# Altium PCB S10B-M-V2.0.PcbDoc (part 2 of 2)
Units mm, origin at the board's own origin, x right, y up, seen from the top; angles counter-clockwise.
Board outline 236.42 x 127.48 mm, 3 copper layers (Top Layer, Internal Plane 2, Bottom Layer); 189 components, 141 nets, 609 pads, 390 vias.
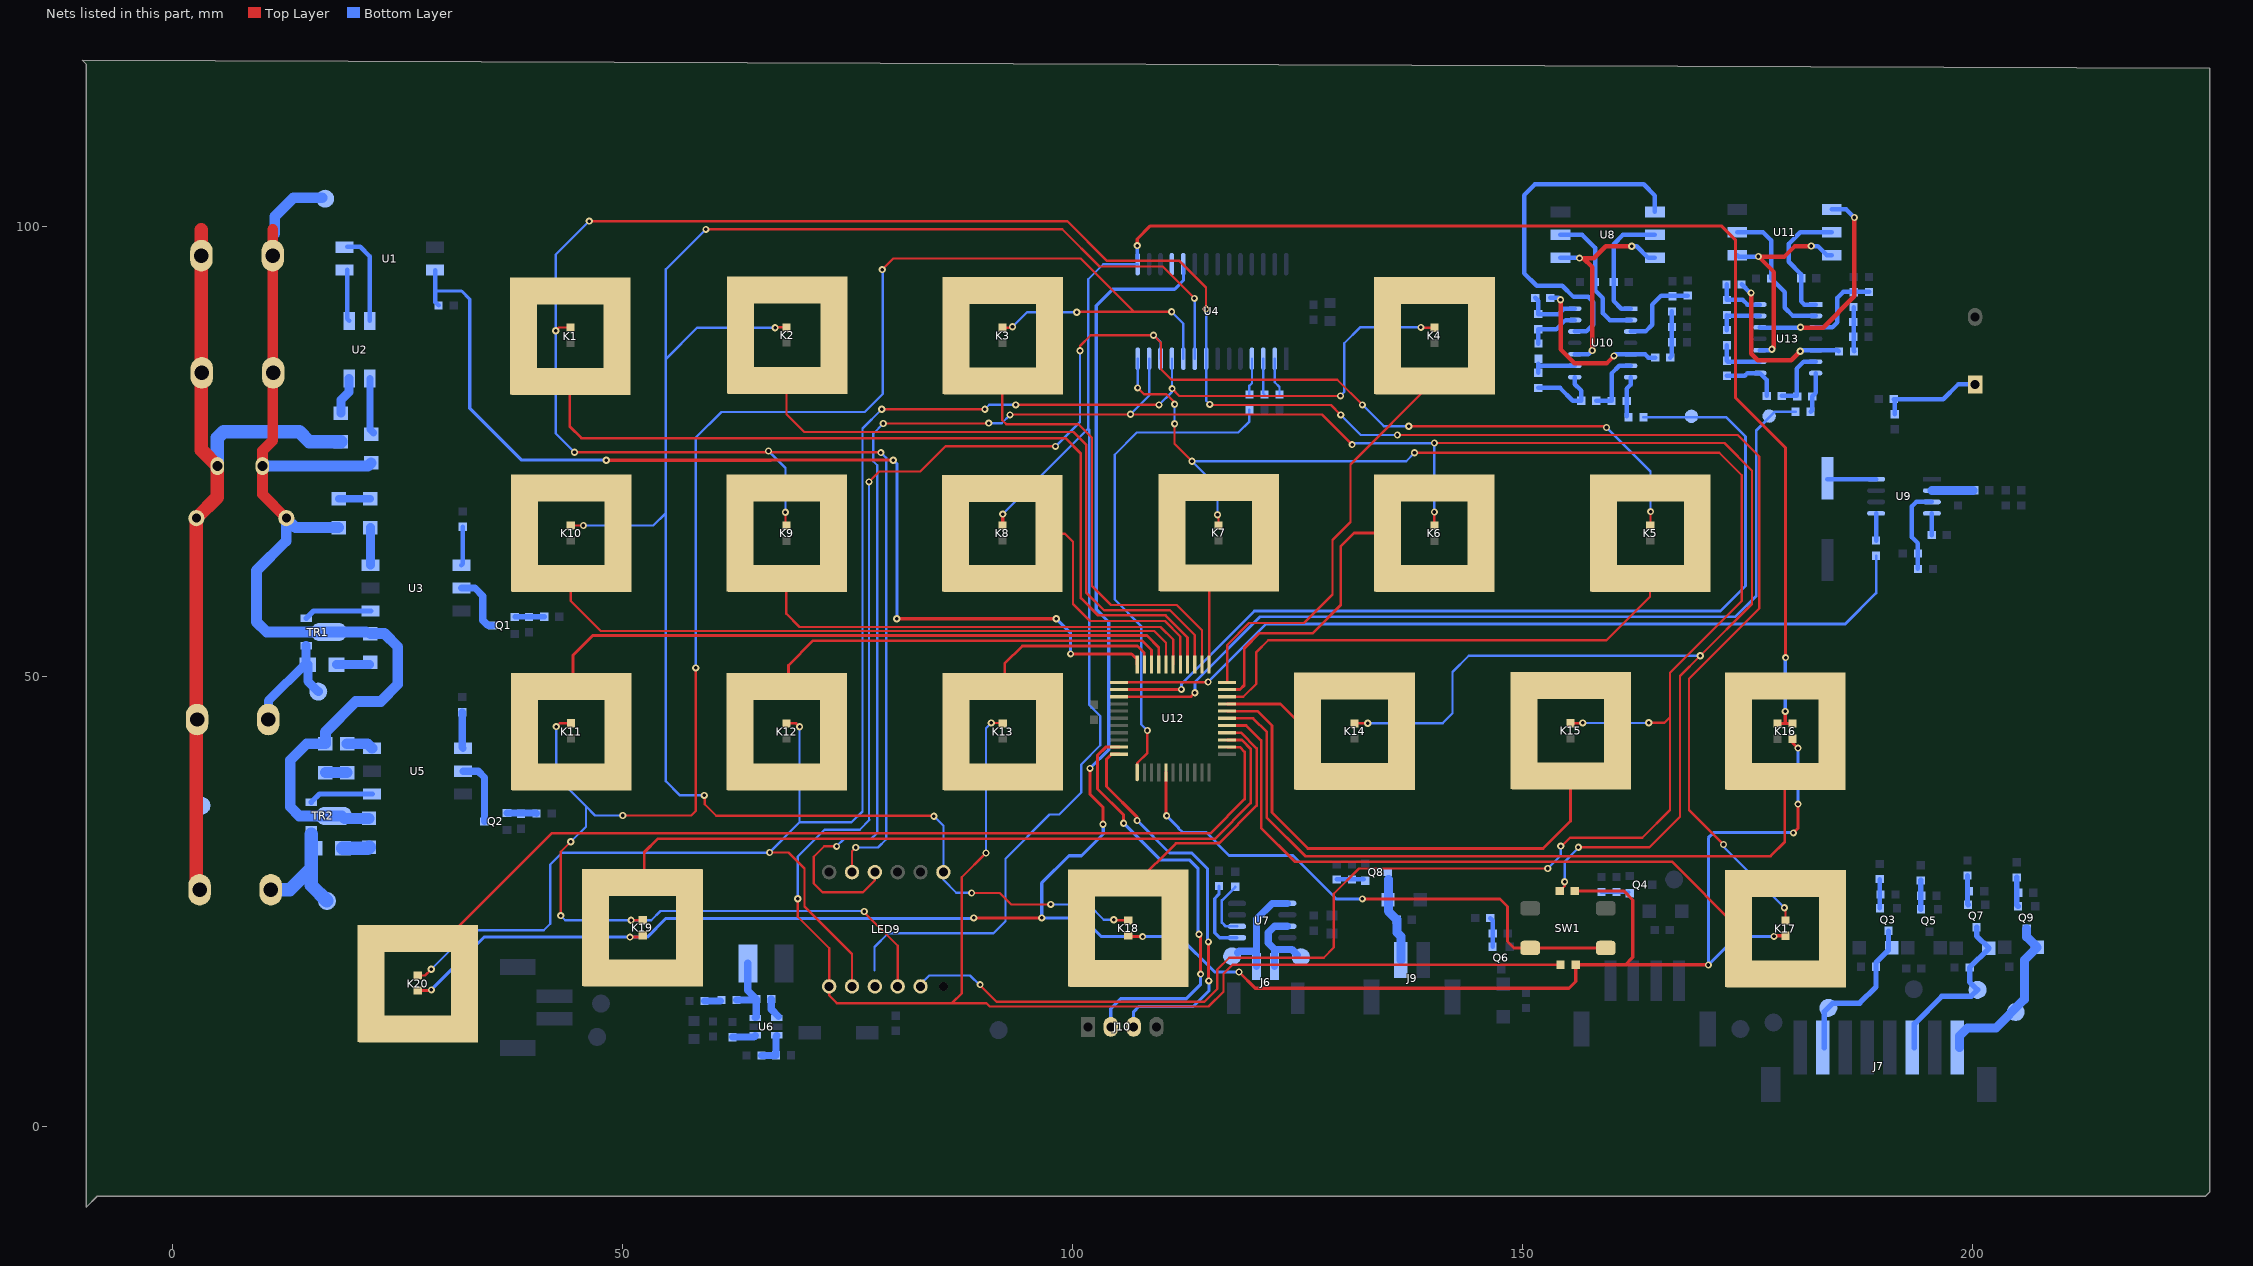
[diagram p3: the nets of this part, all layers, seen from the top]

## Via types
v1: diameter 0.8, hole 0.4, Top Layer to Bottom Layer, tented both sides, 390 vias

## Nets (pads, with @x,y where several pads share a name; then routed paths per layer and width w, separated by ;. In a path a pad name is that pad's centre, name@x,y a point inside that pad or via, vN(x,y) a via of type N, cw(c..) or ccw(c..) an arc to the next point about the centre after c; other vN are vias at no path point) (continued)
GRID6: LED18.2 LED19.2 LED20.2 LED21.2 LED22.2 LED23.2 LED24.2 U4.19 | length 300.8
  Top Layer w0.35: LED21.2@27.239,15.089 28.678,15.089 v1(28.753,15.164) ; v1(50.825,21.031) 52.028,21.031 LED20.2@52.233,21.236 ; v1(89.027,23.165) v1(96.596,23.165) ; v1(101.956,39.776) 101.956,36.906 103.403,35.458 v1(103.403,33.579) ; LED19.2@106.208,21.211 106.337,21.082 v1(107.798,21.082) ; v1(118.516,17.145) 120.32,15.342 155.194,15.342 155.941,16.089 LED22.2@155.941,17.959 161.469,17.959 ; LED23.2@155.84,26.164 161.263,26.164 162.281,25.146 162.281,18.771 161.469,17.959 ; v1(170.688,17.932) 170.661,17.959 161.469,17.959 ; v1(177.978,21.107) 178.056,21.185 LED18.2@179.258,21.185 ; LED24.2@180.035,43.078 180.035,42.647 v1(180.645,42.037) ; v1(180.137,32.614) 180.645,33.122 v1(180.645,35.814)
  Bottom Layer w0.35: v1(28.753,15.164) 34.646,21.057 v1@50.825,21.057 ; v1(50.825,21.031) 52.73,21.031 54.788,23.089 54.8,23.089 ; 54.8,23.101 88.963,23.101 v1(89.027,23.165) ; v1(101.956,39.776) 104.038,41.859 104.038,56.058 102.641,57.455 102.641,91.211 104.47,93.04 111.364,93.04 112.329,94.005 U4.19@112.329,95.82 ; v1@103.429,33.579 103.429,32.487 101.016,30.074 99.619,30.074 96.596,27.051 v1(96.596,23.165) 101.143,23.165 103.226,21.082 v1(107.798,21.082) 111.887,21.082 115.824,17.145 v1(118.516,17.145) ; v1(177.978,21.107) 173.863,21.107 v1(170.688,17.932) 170.688,32.055 171.272,32.639 180.111,32.639 v1(180.137,32.614) ; v1(180.645,35.814) v1(180.645,42.037)
GRID7: U4.18
IR: R25.1 U12.34 | length 92.5
  Top Layer w0.3: U12.34@105.198,49.346 115.107,49.346 v1(115.076,49.378)
  Bottom Layer w0.3: v1(115.076,49.378) 121.527,55.829 185.903,55.829 189.332,59.258 R25.1@189.332,63.424
ISP_CK: J10.3 U12.44 | length 44.5
  Top Layer w0.35: U12.44@105.198,41.346 104.338,41.346 103.784,40.792 103.784,37.77 107.188,34.366 v1(107.188,33.985) ; v1(115.113,20.498) 115.138,20.472 v1@115.138,16.154
  Bottom Layer w0.35: J10.3@106.807,11.049 106.807,12.751 107.366,13.31 113.436,13.31 115.164,15.037 v1(115.164,16.154) ; v1(107.188,33.985) 110.795,30.378 113.259,30.378 115.011,28.626 v1@115.011,20.498
ISP_DA: J10.2 U12.43 | length 48.1
  Top Layer w0.35: U12.43@105.198,42.146 103.69,42.146 102.794,41.25 102.794,37.49 105.689,34.595 v1(105.689,33.68) ; v1(114.071,21.336) 114.249,21.158 v1(114.249,16.916)
  Bottom Layer w0.35: J10.2@104.267,11.049 104.267,13.081 105.359,14.173 112.649,14.173 114.249,15.773 v1(114.249,16.916) ; v1(105.689,33.68) 109.753,29.616 112.979,29.616 113.97,28.626 113.97,21.336 v1(114.071,21.336)
K1: K1.2 U12.26 | length 95.8
  Top Layer w0.3: K1.2@44.142,82.782 44.142,77.753 45.415,76.479 99.212,76.479 100.94,74.752 100.94,58.725 102.87,56.794 110.338,56.794 112.799,54.333 U12.26@112.799,51.346
K2: K2.2 U12.25 | length 72.2
  Top Layer w0.254: K2.2@68.232,82.91 68.232,79.139 70.206,77.165 100.127,77.165 101.524,75.768 101.524,59.329 103.499,57.353 110.846,57.353 113.599,54.6 U12.25@113.599,51.346
K3: K3.2 U12.24 | length 50.5
  Top Layer w0.254: K3.2@92.199,82.858 92.199,78.489 92.659,78.029 100.686,78.029 102.184,76.53 102.184,60.042 104.289,57.937 111.608,57.937 114.399,55.146 U12.24@114.399,51.346 ; K3.2@97.457,87.862 K3.2@98.244,87.862
K4: K4.2 U12.22 | length 46.6
  Top Layer w0.254: U12.22@117.199,49.346 117.199,53.495 119.634,55.931 125.73,55.931 128.905,59.106 128.905,65.176 130.899,67.17 130.899,73.569 K4.2@140.19,82.86
K5: K5.2 U12.20 | length 55.7
  Top Layer w0.254: U12.20@117.199,47.746 118.993,47.746 120.447,49.2 120.447,52.705 121.768,54.026 159.36,54.026 164.193,58.859 K5.2@164.193,60.889
K6: K6.2 U12.21 | length 31.3
  Top Layer w0.3: U12.21@117.199,48.546 118.625,48.546 119.101,49.022 119.101,53.137 120.777,54.813 126.721,54.813 129.819,57.912 129.819,64.465 131.297,65.943 K6.2@135.015,65.943
K7: K7.2 U12.23 | length 10
  Top Layer w0.254: U12.23@115.199,51.346 115.199,59.926 K7.2@116.212,60.939
K8: K8.2 U12.27 | length 26.5
  Top Layer w0.254: K8.2@97.416,65.867 99.182,65.867 100.076,64.973 100.076,58.039 101.956,56.159 110.287,56.159 111.999,54.448 U12.27@111.999,51.346
K9: K9.2 U12.28 | length 50.9
  Top Layer w0.254: K9.2@68.206,60.889 68.206,56.965 69.672,55.499 109.804,55.499 111.199,54.105 U12.28@111.199,51.346
K10: K10.2 U12.29 | length 73
  Top Layer w0.254: K10.2@44.229,60.889 44.229,58.387 47.574,55.042 109.093,55.042 110.399,53.736 U12.29@110.399,51.346
K11: K11.2 U12.30 | length 71.9
  Top Layer w0.3: K11.2@44.483,48.893 44.483,52.357 46.685,54.559 108.28,54.559 109.599,53.241 U12.30@109.599,51.346
K12: K12.2 U12.31 | length 45.9
  Top Layer w0.3: K12.2@68.435,48.893 68.435,51.239 71.171,53.975 107.747,53.975 108.799,52.923 U12.31@108.799,51.346
K13: K13.2 U12.32 | length 20.5
  Top Layer w0.3: K13.2@92.463,48.893 92.463,51.417 94.437,53.391 107.213,53.391 107.999,52.606 U12.32@107.999,51.346
K14: K14.2 U12.19 | length 10.2
  Top Layer w0.3: U12.19@117.199,46.946 121.583,46.946 123.125,46.946 K14.2@126.15,43.921
K15: K15.2 U12.18 | length 56.4
  Top Layer w0.3: U12.18@117.199,46.146 120.579,46.146 122.174,44.552 122.174,34.874 126.162,30.886 152.324,30.886 155.354,33.916 K15.2@155.354,38.918
K16: K16.2 U12.17 | length 81.8
  Top Layer w0.3: U12.17@117.199,45.346 120.084,45.346 121.615,43.815 121.615,34.29 125.882,30.023 177.597,30.023 179.179,31.605 K16.2@179.179,38.892
K17: K17.2 U12.16 | length 71.9
  Top Layer w0.3: U12.16@117.199,44.546 119.309,44.546 120.972,42.883 120.972,33.155 124.714,29.413 166.643,29.413 K17.2@174.055,22.001
K18: K18.2 U12.15 | length 28
  Top Layer w0.3: K18.2@106.408,27.049 107.085,27.049 111.489,31.453 116.031,31.453 116.074,31.496 116.332,31.496 120.472,35.636 120.472,42.012 118.738,43.746 U12.15@117.199,43.746
K19: K19.2 U12.14 | length 82.1
  Top Layer w0.3: K19.2@52.407,27.075 52.407,30.462 53.899,31.953 115.824,31.953 119.812,35.941 119.812,41.961 118.826,42.946 U12.14@117.199,42.946
K20: K20.2 U12.13 | length 105.5
  Top Layer w0.3: K20.2@27.439,20.877 30.428,20.877 42.113,32.563 115.341,32.563 119.151,36.373 119.151,41.605 118.61,42.146 U12.13@117.199,42.146
L: J1.1 J2.2 pad.4 R3.2 R4.2 R13.2 R66.1 R67.1 TC1.2 TR1.2 TR2.2 VDR1.1 | length 124.2
  Top Layer w1.2: 11.108,99.67 J2.2@11.108,96.776 11.108,76.233 9.968,75.093 VDR1.1@9.968,73.381 9.968,70.242 TC1.2@12.62,67.589
  Bottom Layer w1.2: VDR1.1@9.968,73.381 21.691,73.381 R3.2@22.047,73.737 ; 11.328,99.238 11.328,101.117 13.411,103.2 pad.4@16.586,103.2 ; R4.2@18.44,66.548 13.661,66.548 TC1.2@12.62,67.589 12.62,65.071 9.322,61.773 9.322,56.058 10.439,54.94 TR1.2@14.834,54.94 17.371,54.94 TR1.2@17.374,54.938 R66.1@21.452,54.938 ; R67.1@21.819,34.214 19.075,34.214 18.796,34.493 TR2.2@15.392,34.493 14.072,34.493 13.056,35.509 13.056,40.691 14.884,42.519 R13.2@16.967,42.519 16.967,43.84 20.345,47.219 23.114,47.219 25.019,49.124 25.019,53.289 23.546,54.762 R66.1@21.971,54.762
LEFT: C19.2 D5.1 J7.6 pad.16@200.609,15.164 Q7.C | length 20
  Bottom Layer w0.6: J7.6@193.577,8.738 193.577,11.382 196.647,14.453 199.898,14.453 pad.16@200.609,15.164 199.731,16.042 C19.2@199.731,17.655 201.854,19.778 D5.1@201.854,19.812 200.508,21.158 Q7.C@200.508,22.143
LEG: C16.2 D1.1 J7.2 pad.16@184.023,13.157 Q3.C | length 17.7
  Bottom Layer w0.6: J7.2@183.577,8.738 183.577,12.736 184.531,13.691 187.503,13.691 189.317,15.505 C16.2@189.317,17.731 189.317,18.197 190.703,19.583 Q3.C@190.703,21.712
N: J1.2 J2.1 J3.2 J4.2 pad.3 R1.2 TC1.1 VDR1.2 | length 92.8
  Top Layer w1.5: J4.2@2.985,26.291 2.62,26.655 TC1.1@2.62,67.589 4.968,69.937 VDR1.2@4.968,73.381 3.188,75.16 3.188,99.644
  Bottom Layer w1.5: VDR1.2@4.968,73.381 4.968,76.519 5.664,77.216 14.046,77.216 15.189,76.073 R1.2@18.694,76.073
NetBUZZ1_2: BUZZ1.2 R18.1 R21.1 | length 11.4
  Bottom Layer w0.5: R21.1@191.4,79.148 191.4,80.723 R18.1@191.298,80.824 196.801,80.824 198.434,82.458 BUZZ1.2@200.33,82.458
NetC5_1: C5.1 U6.1 | length 2.3
  Bottom Layer w0.8: C5.1@66.533,14.149 66.533,13.015 U6.1@67.335,12.213
NetC5_2: C5.2 L1.1 R24.2 U6.6 | length 8.7
  Bottom Layer w0.8: R24.2@62.672,14.048 64.755,14.048 C5.2@64.857,14.149 ; L1.1@63.924,18.112 63.924,15.083 C5.2@64.857,14.149 ; U6.6@64.749,12.076 64.857,12.184 C5.2@64.857,14.149
NetC6_1: C6.1 R23.2 U9.3 | length 9.6
  Bottom Layer w0.5: R23.2@193.98,61.951 C6.1@193.98,63.652 193.98,64.821 193.319,65.481 193.319,68.91 193.802,69.393 U9.3@195.529,69.393
NetC7_2: C7.2 R24.1 | length 1.8
  Bottom Layer w0.8: C7.2@59.116,13.921 R24.1@60.869,13.921
NetC11_2: C11.2 L2.2 U9.2 | length 4.6
  Bottom Layer w1: U9.2@195.529,70.663 C11.2@200.101,70.663
NetC12_2: C12.2 U8.2 U10.1 | length 13.6
  Bottom Layer w0.5: U10.1@162.037,90.883 161.009,90.883 160.158,91.734 C12.2@160.158,93.829 160.158,98.055 161.188,99.085 U8.2@164.744,99.085
NetC14_1: C14.1 U9.4 | length 2.4
  Bottom Layer w0.5: C14.1@195.504,65.71 195.504,68.097 U9.4@195.529,68.123
NetC15_2: C15.2 R30.2 R34.2 R38.1 | length 5.2
  Bottom Layer w0.5: R34.2@166.457,85.447 166.635,85.625 C15.2@166.635,87.149 R38.1@166.635,88.851 R30.2@166.635,90.578
NetC17_2: C17.2 U11.2 U13.1 | length 14
  Bottom Layer w0.5: U13.1@182.611,91.34 181.354,91.34 181.011,91.683 C17.2@181.011,94.261 181.011,94.681 179.603,96.088 179.603,98.069 180.899,99.365 U11.2@184.404,99.365
NetC20_2: C20.2 D7.1 J9.1 Q8.C | length 9.5
  Bottom Layer w1: 135.113,27.403 135.113,23.903 C20.2@136.053,22.963 136.053,21.559 136.505,21.107 J9.1@136.505,18.485
NetC25_2: C25.2 R51.2 R54.2 R58.1 | length 4.9
  Bottom Layer w0.5: R51.2@186.828,91.061 186.828,86.184 R54.2@186.878,86.133
NetC26_1: C26.1 R66.2 | length 3.7
  Bottom Layer w1: C26.1@18.212,51.308 R66.2@21.882,51.308
NetC26_2: C26.2 J3.1 pad.6 TR1.1 | length 13.4
  Bottom Layer w1: J3.1@10.625,45.214 10.625,47.278 14.834,51.486 TR1.1@14.834,53.416 ; C26.2@15.012,51.308 15.012,49.479 pad.6@16.18,48.311
NetC27_1: C27.1 R67.2 | length 2.9
  Bottom Layer w1.5: C27.1@18.923,30.886 21.691,30.886 R67.2@21.819,31.014
NetC27_2: C27.2 J4.1 pad.5 TR2.1 | length 13.6
  Bottom Layer w1.5: J4.1@10.905,26.291 13.006,26.291 15.392,28.677 ; 15.392,32.436 15.392,28.677 ; pad.5@17.145,25.044 15.392,26.797 15.392,28.677
NetJ6_1: J6.1 pad.8 U7.5 | length 11.6
  Bottom Layer w0.8: pad.8@118.364,19.279 118.542,19.456 120.474,19.456 ; J6.1@120.474,17.759 120.474,19.456 ; U7.5@123.886,24.767 122.201,24.767 120.474,23.039 120.474,19.456
NetJ6_2: J6.2 pad.9 U7.7 | length 9.3
  Bottom Layer w0.8: J6.2@122.474,17.759 122.474,19.665 ; U7.7@123.886,22.227 122.455,22.227 121.768,21.539 121.768,20.371 122.474,19.665 ; pad.9@124.993,19.05 124.379,19.665 122.474,19.665
NetQ1_B: Q1.B R7.1 R9.2 | length 3.3
  Bottom Layer w0.6: Q1.B@38.04,56.628 41.27,56.628 R9.2@41.286,56.644
NetQ1_C: Q1.C U3.2 | length 6.8
  Bottom Layer w0.8: U3.2@32.091,59.819 33.603,59.819 34.468,58.953 34.468,56.236 35.025,55.678 Q1.C@35.54,55.678
NetQ2_B: Q2.B R15.1 R16.2 | length 3.3
  Bottom Layer w0.8: Q2.B@37.151,34.835 40.386,34.835 R16.2@40.447,34.774
NetQ2_C: Q2.C U5.2 | length 7.6
  Bottom Layer w0.8: U5.2@32.258,39.472 33.96,39.472 34.651,38.781 Q2.C@34.651,33.885
NetQ3_B: Q3.B R27.1 R33.1 | length 3.3
  Bottom Layer w0.5: R33.1@189.738,27.483 189.738,24.227 Q3.B@189.753,24.212
NetQ4_B: Q4.B R32.1 R35.1 | length 3
  Bottom Layer w0.4: R35.1@158.801,26.035 R32.1@160.477,26.035 Q4.B@161.808,26.035
NetQ5_B: Q5.B R40.1 R44.2 | length 3.2
  Bottom Layer w0.6: R44.2@194.285,27.33 194.285,24.125 Q5.B@194.3,24.11
NetQ6_B: Q6.B R42.1 R46.1 | length 3.3
  Bottom Layer w0.5: R46.1@146.442,23.141 146.711,22.872 Q6.B@146.711,19.971
NetQ7_B: Q7.B R50.1 R53.2 | length 3.2
  Bottom Layer w0.6: R53.2@199.492,27.864 199.492,24.709 Q7.B@199.558,24.643
NetQ8_B: Q8.B R55.1 R60.1 | length 3
  Bottom Layer w0.5: R60.1@129.388,27.432 R55.1@131.064,27.432 Q8.B@132.395,27.432
NetQ9_B: Q9.B R61.1 R64.2 | length 3.3
  Bottom Layer w0.6: R64.2@204.953,27.661 204.953,24.608 Q9.B@205.12,24.44
NetR1_1: R1.1 U2.AC2 | length 4.2
  Bottom Layer w1: R1.1@18.694,79.273 18.694,80.721 19.612,81.639 U2.AC2@19.612,83.111
NetR3_1: R3.1 U2.AC1 | length 6.2
  Bottom Layer w0.8: U2.AC1@21.912,83.111 21.912,77.478 R3.1@22.301,77.089
NetR4_1: R4.1 R5.1 | length 3.5
  Bottom Layer w0.8: R4.1@18.44,69.748 R5.1@21.971,69.748
NetR5_2: R5.2 U3.6 | length 4.2
  Bottom Layer w1: U3.6@21.971,62.378 R5.2@21.971,66.548
NetR6_2: R6.2 U3.1 | length 4.4
  Bottom Layer w0.5: U3.1@32.091,62.359 32.243,62.511 R6.2@32.243,66.651
NetR8_2: R8.2 U4.2 | length 4.2
  Bottom Layer w0.254: U4.2@122.489,85.32 122.489,82.692 123.023,82.158 R8.2@123.023,81.332
NetR10_2: R10.2 U4.3 | length 4
  Bottom Layer w0.254: U4.3@121.219,85.32 121.219,81.459 R10.2@121.346,81.332
NetR11_2: R11.2 U4.4 | length 4.1
  Bottom Layer w0.254: R11.2@119.67,81.332 119.67,82.307 119.949,82.586 U4.4@119.949,85.32
NetR12_1: R12.1 R13.1 | length 2.4
  Bottom Layer w1.2: R13.1@16.967,39.319 R12.1@19.38,39.319
NetR12_2: R12.2 U5.6 | length 3
  Bottom Layer w1.2: R12.2@19.38,42.519 21.65,42.519 U5.6@22.158,42.012
NetR14_2: R14.2 U5.1 | length 4
  Bottom Layer w0.8: R14.2@32.182,46.025 32.182,42.088 U5.1@32.258,42.012
NetR17_1: R17.1 R20.2 U6.3 | length 3.8
  Bottom Layer w0.8: R17.1@65.441,7.876 67.016,7.876 R20.2@67.041,7.901 67.041,9.981 U6.3@67.135,10.076
NetR19_2: R19.2 U6.4 | length 2.6
  Bottom Layer w0.8: R19.2@62.215,9.908 64.581,9.908 U6.4@64.749,10.076
NetR22_2: R22.2 U7.2 | length 6.4
  Bottom Layer w0.3: R22.2@118.11,26.619 116.611,25.121 116.611,22.658 117.043,22.227 U7.2@118.298,22.227
NetR25_2: R25.2 U9.5 | length 3
  Bottom Layer w0.5: U9.5@189.329,68.123 189.329,65.103 R25.2@189.332,65.1
NetR26_1: R26.1 R31.1 U10.14 | length 6.3
  Bottom Layer w0.5: R26.1@151.445,92.077 151.776,91.746 R31.1@151.776,90.273 154.027,90.273 154.637,90.883 U10.14@155.837,90.883
NetR26_2: R26.2 R34.1 U10.5 | length 18.4
  Top Layer w0.5: v1(154.254,91.872) 154.254,86.36 155.778,84.836 159.41,84.836 v1(160.198,85.623)
  Bottom Layer w0.5: R26.2@153.122,92.077 154.049,92.077 v1(154.254,91.872) ; v1(160.198,85.623) 160.377,85.803 U10.5@162.037,85.803 163.651,85.803 164.006,85.447 R34.1@164.78,85.447
NetR28_2: R28.2 R36.1 U10.3 | length 9.3
  Bottom Layer w0.5: U10.3@162.037,88.343 163.705,88.343 164.44,89.078 164.44,91.338 165.43,92.329 R28.2@168.402,92.329
NetR29_1: R29.1 U8.5 U10.2 | length 15.5
  Bottom Layer w0.5: U8.5@154.244,99.085 156.642,99.085 158.1,97.627 R29.1@158.1,93.855 158.1,92.903 158.966,92.037 158.966,90.361 159.714,89.613 U10.2@162.037,89.613
NetR31_2: R31.2 R37.1 U10.13 | length 6.1
  Bottom Layer w0.5: R37.1@151.801,86.997 151.801,88.571 R31.2@151.776,88.597 153.799,88.597 154.815,89.613 U10.13@155.837,89.613
NetR37_2: R37.2 R41.2 U10.9 | length 5.1
  Bottom Layer w0.5: R41.2@151.776,83.745 151.776,84.734 151.977,84.533 U10.9@155.837,84.533
NetR39_1: R39.1 R43.2 U10.6 | length 7.2
  Bottom Layer w0.5: R43.2@158.227,80.647 158.253,80.621 R39.1@159.929,80.621 159.929,83.678 160.784,84.533 U10.6@162.037,84.533
NetR39_2: R39.2 R45.2 U10.7 | length 4.5
  Bottom Layer w0.5: R45.2@161.631,78.919 161.631,82.002 162.037,82.408 U10.7@162.037,83.263
NetR41_1: R41.1 R43.1 U10.8 | length 8.3
  Bottom Layer w0.5: R41.1@151.776,82.069 154.202,82.069 155.624,80.647 R43.1@156.551,80.647 156.551,81.777 155.837,82.491 U10.8@155.837,83.263
NetR47_1: R47.1 R52.1 U13.14 | length 5.6
  Bottom Layer w0.5: R47.1@172.705,93.575 172.705,91.899 R52.1@172.756,91.848 174.522,91.848 175.03,91.34 U13.14@176.411,91.34
NetR47_2: R47.2 R54.1 U13.5 | length 18.8
  Top Layer w0.5: v1(175.438,92.634) 175.438,85.877 176.174,85.141 179.883,85.141 v1(180.899,86.157)
  Bottom Layer w0.5: R47.2@174.382,93.575 175.323,92.634 v1(175.438,92.634) ; v1(180.899,86.157) 181.002,86.26 U13.5@182.611,86.26 185.075,86.26 R54.1@185.202,86.133
NetR48_2: R48.2 R56.1 U13.3 | length 9.2
  Bottom Layer w0.5: U13.3@182.611,88.8 184.482,88.8 185.039,89.357 185.039,92.1 185.674,92.735 R48.2@188.544,92.735
NetR49_1: R49.1 U11.5 U13.2 | length 16.1
  Bottom Layer w0.5: U11.5@173.904,99.365 176.759,99.365 177.658,98.465 R49.1@177.658,94.236 179.172,92.722 179.172,90.983 180.084,90.07 U13.2@182.611,90.07
NetR52_2: R52.2 R57.1 U13.13 | length 5.4
  Bottom Layer w0.5: R57.1@172.756,88.495 R52.2@172.756,90.172 172.858,90.07 U13.13@176.411,90.07
NetR57_2: R57.2 R62.2 U13.9 | length 5.4
  Bottom Layer w0.5: R57.2@172.756,86.819 R62.2@172.756,85.092 172.858,84.99 U13.9@176.411,84.99
NetR59_1: R59.1 R63.2 U13.6 | length 7.1
  Bottom Layer w0.5: R63.2@178.852,81.18 180.503,81.18 180.503,84.226 181.267,84.99 U13.6@182.611,84.99
NetR59_2: R59.2 R65.2 U13.7 | length 4.5
  Bottom Layer w0.5: R65.2@182.052,79.427 182.23,79.605 R59.2@182.23,81.129 182.611,81.51 U13.7@182.611,83.72
NetR62_1: R62.1 R63.1 U13.8 | length 6.6
  Bottom Layer w0.5: R62.1@172.756,83.415 174.728,83.415 175.033,83.72 U13.8@176.411,83.72 177.176,82.956 R63.1@177.176,81.18
NetR68_2: R68.2 U7.1 | length 8.1
  Bottom Layer w0.35: R68.2@116.281,26.721 116.281,25.781 115.824,25.324 115.824,21.514 116.381,20.957 U7.1@118.298,20.957
NetTR1_3: TR1.3 U3.4 | length 7.5
  Bottom Layer w0.6: TR1.3@14.834,56.464 15.648,57.279 U3.4@21.991,57.279
NetTR2_3: TR2.3 U5.4 | length 7.1
  Bottom Layer w0.6: TR2.3@15.392,36.017 16.307,36.932 U5.4@22.158,36.932
NetU1_1: U1.1 U2.V+ | length 5.8
  Bottom Layer w0.5: U1.1@19.391,95.226 19.391,89.732 U2.V+@19.612,89.511
NetU1_2: U1.2 U2.V- | length 10.1
  Bottom Layer w0.5: U1.2@19.391,97.766 20.826,97.766 21.912,96.68 U2.V-@21.912,89.511
NetU8_1: U8.1 U8.6 U10.10 | length 24
  Top Layer w0.5: v1(157.785,86.233) 157.785,95.504 156.794,96.495 157.963,96.495 159.283,97.815 v1(162.179,97.815)
  Bottom Layer w0.5: U8.6@154.244,96.545 156.312,96.545 v1(156.362,96.495) ; U10.10@155.837,85.803 157.355,85.803 v1(157.785,86.233) ; v1(162.179,97.815) 162.712,97.815 163.983,96.545 U8.1@164.744,96.545
NetU8_3: U8.3 U10.12 | length 39.9
  Bottom Layer w0.5: U10.12@155.837,88.343 157.126,88.343 157.886,89.103 157.886,91.618 157.328,92.177 155.702,92.177 154.445,93.434 151.6,93.434 150.203,94.831 150.203,103.492 151.409,104.699 163.5,104.699 164.744,103.455 U8.3@164.744,101.625
NetU9_8: U9.8 Y1.1 | length 5.4
  Bottom Layer w0.5: Y1.1@183.921,71.933 U9.8@189.329,71.933
NetU11_1: U11.1 U11.6 U13.10 | length 24
  Top Layer w0.5: v1(177.749,86.36) 177.978,86.589 177.978,94.945 v1(176.251,96.672) 179.146,96.672 180.315,97.841 v1(182.118,97.841)
  Bottom Layer w0.5: U11.6@173.904,96.825 174.081,96.647 176.251,96.647 v1(176.251,96.672) ; U13.10@176.411,86.26 177.649,86.26 v1(177.749,86.36) ; v1(182.118,97.841) 182.855,97.841 183.871,96.825 U11.1@184.404,96.825
NetU11_3: U11.3 U13.12 | length 23.6
  Top Layer w0.5: v1@180.924,88.773 183.439,88.773 186.919,92.253 v1(186.919,101.016)
  Bottom Layer w0.5: U13.12@176.411,88.8 176.438,88.773 180.873,88.773 v1(180.924,88.824) ; U11.3@184.404,101.905 186.03,101.905 v1(186.919,101.016)
P_KEY: SW1.2 U12.5 | length 62.1
  Top Layer w0.3: v1@110.399,34.519 U12.5@110.399,39.346 ; v1(132.232,25.273) 147.523,25.273 148.361,24.435 148.361,20.535 149.073,19.823 SW1.2@150.877,19.823 SW1.2@159.277,19.823
  Bottom Layer w0.3: v1(110.465,34.519) 111.798,33.185 111.798,33.109 112.217,32.69 114.833,32.69 117.424,30.099 124.511,30.099 129.337,25.273 v1(132.232,25.273)
RIGHT: C21.2 D6.1 J7.8 pad.16@204.851,12.7 Q9.C | length 19.1
  Bottom Layer w1: J7.8@198.577,8.738 198.577,10.032 199.466,10.922 202.641,10.922 205.816,14.097 C21.2@205.816,17.729 205.816,18.466 D6.1@207.239,19.888 206.07,21.057 Q9.C@206.07,21.94
S1_AD: pad.18 R65.1 U12.36 | length 99.8
  Top Layer w0.3: U12.36@105.198,47.746 113.177,47.746 v1(113.614,48.184)
  Bottom Layer w0.3: v1(113.614,48.184) 113.614,49.378 120.879,56.642 173.685,56.642 176.009,58.966 176.009,77.356 178.081,79.427 R65.1@180.376,79.427
S2_AD: pad.17 R45.1 U12.35 | length 103.6
  Top Layer w0.3: U12.35@105.198,48.546 112.097,48.546 v1(112.116,48.565)
  Bottom Layer w0.3: v1(112.116,48.565) 112.116,49.174 120.218,57.277 172.034,57.277 174.815,60.058 174.815,76.67 172.669,78.816 R45.1@163.474,78.816
SEGA: LED1.1 LED9.11 LED10.1 LED18.1 U4.8 | length 330.6
  Top Layer w0.254: v1(42.57,88.417) 42.928,88.775 LED1.1@44.207,88.775 ; v1(44.653,74.93) 78.664,74.93 v1(78.715,74.879) ; v1(46.304,100.609) 99.416,100.609 103.835,96.19 111.912,96.19 114.859,93.243 v1(114.859,90.83) ; v1(68.097,68.25) 68.097,66.865 LED10.1@68.21,66.753 ; LED9.11@75.499,28.246 75.499,30.567 v1(75.921,30.988) ; v1(115.265,80.239) 115.341,80.162 128.727,80.162 v1(129.819,79.07) ; v1(136.119,76.835) 173.965,76.835 176.352,74.447 176.352,57.556 168.529,49.733 168.529,35.154 v1(172.364,31.318) ; v1(179.136,24.297) 179.258,24.297 LED18.1@179.258,22.862
  Bottom Layer w0.254: v1(44.653,74.93) 42.57,77.013 v1(42.57,88.417) 42.57,96.901 v1@46.291,100.622 ; v1(66.218,75.057) 68.097,73.177 v1(68.097,68.25) ; v1(75.921,30.988) 78.384,30.988 79.299,31.902 79.299,74.295 v1(78.715,74.879) ; v1(114.859,90.83) 114.869,90.82 U4.8@114.869,85.32 114.869,80.634 v1(115.265,80.239) ; v1(129.819,79.07) 132.055,76.835 v1(136.119,76.835) ; v1(172.364,31.318) 172.364,31.069 v1(179.136,24.297)
SEGB: LED2.1 LED9.7 LED11.1 LED19.1 U4.9 | length 215.7
  Top Layer w0.254: LED11.1@44.232,66.778 v1(45.645,66.778) ; v1(59.08,36.779) 59.131,36.779 59.131,35.789 60.401,34.519 84.557,34.519 v1(84.607,34.468) ; v1(59.258,99.695) 98.882,99.695 103.022,95.555 110.033,95.555 v1(113.563,92.024) ; v1(66.954,88.748) 67.007,88.8 LED2.1@68.21,88.8 ; LED9.7@85.659,28.361 LED9.7@85.928,28.092 ; v1(88.798,25.933) 91.923,25.933 93.193,24.663 v1(97.587,24.663) ; v1(104.597,22.962) 104.672,22.887 LED19.1@106.208,22.887
  Bottom Layer w0.254: v1(45.645,66.778) 53.418,66.778 54.813,68.174 ; v1(59.08,36.779) 56.388,36.779 54.813,38.354 54.813,68.174 ; v1(59.258,99.695) 54.813,95.25 54.813,85.293 ; v1(66.954,88.748) 58.268,88.748 54.813,85.293 ; v1(84.607,34.468) 85.659,33.416 LED9.7@85.659,28.246 85.659,27.396 87.097,25.959 v1@88.798,25.959 ; v1(97.587,24.663) 101.778,24.663 103.48,22.962 v1(104.597,22.962) ; v1(113.563,92.024) 113.599,91.988 U4.9@113.599,85.32 ; 54.813,68.174 54.813,85.293
SEGC: LED3.1 LED9.4 LED12.1 LED20.1 U4.10 | length 218
  Top Layer w0.254: v1(42.621,44.425) 43.004,44.807 LED12.1@44.257,44.807 ; v1(43.129,23.419) 43.129,30.505 v1(44.247,31.623) ; v1(50.013,34.544) 57.633,34.544 58.141,35.052 v1(58.141,50.952) ; v1(50.952,22.911) 50.954,22.912 LED20.1@52.233,22.912 ; v1@76.81,23.825 80.579,20.055 LED9.4@80.579,15.546 ; v1(78.867,95.225) 80.086,96.444 100.914,96.444 106.832,90.526 ; LED3.1@92.238,88.749 93.22,88.749 v1(93.345,88.875) ; v1(100.482,90.475) 100.533,90.526 106.832,90.526 ; v1(111.023,90.526) 106.832,90.526
  Bottom Layer w0.254: v1(42.621,44.425) 42.621,38.862 45.923,35.56 ; v1(43.129,23.419) 43.637,22.911 v1(50.952,22.911) 53.188,22.911 54.204,23.927 76.81,23.927 v1(76.86,23.876) ; v1(44.247,31.623) 45.923,33.299 45.923,35.56 ; v1(50.013,34.544) 46.939,34.544 45.923,35.56 ; v1(58.141,50.952) 58.141,76.556 60.985,79.4 76.911,79.4 78.905,81.394 78.905,95.187 v1(78.867,95.225) ; v1(93.345,88.875) 94.945,90.475 v1(100.482,90.475) ; v1(111.023,90.526) 112.329,89.22 U4.10@112.329,85.32
SEGD: LED4.1 LED9.2 LED13.1 LED21.1 U4.11 | length 210.7
  Top Layer w0.254: LED21.1@27.239,16.766 28.043,16.766 v1(28.727,17.45) ; v1(66.345,30.429) 68.428,30.429 70.218,28.639 70.218,24.422 75.499,19.141 LED9.2@75.499,15.546 ; LED13.1@68.235,44.782 69.29,44.782 v1(69.672,44.399) ; v1(78.803,79.693) 90.259,79.693 v1(90.272,79.705) ; v1(93.701,80.188) v1(109.626,80.188) ; v1(111.074,81.991) 111.887,81.178 v1(129.794,81.178) ; v1(138.735,88.798) 138.784,88.749 LED4.1@140.244,88.749
  Bottom Layer w0.254: v1(28.727,17.45) 33.071,21.793 41.25,21.793 41.961,22.504 41.961,29.108 43.256,30.404 v1@66.294,30.404 ; v1@66.332,30.442 69.672,33.782 ; v1(69.672,44.399) 69.672,33.782 ; v1(78.803,79.693) 76.657,77.546 76.657,35.001 75.438,33.782 69.672,33.782 ; v1(90.272,79.705) 90.754,80.188 v1(93.701,80.188) ; v1(109.626,80.188) v1@111.059,81.621 ; v1@111.059,81.991 U4.11@111.059,85.32 ; v1(129.794,81.178) 130.226,81.61 130.226,87.046 131.978,88.798 v1(138.735,88.798)
SEGE: LED5.1 LED9.1 LED14.1 LED22.1 U4.12 | length 298.9
  Top Layer w0.254: v1(69.469,25.298) 69.469,23.292 72.959,19.801 LED9.1@72.959,15.546 72.959,14.544 73.812,13.691 86.614,13.691 ; v1(77.394,71.628) 78.537,72.771 83.083,72.771 85.903,75.59 98.095,75.59 v1(98.12,75.565) ; v1(90.399,30.378) 87.693,27.673 87.693,14.77 86.614,13.691 ; v1(90.983,44.831) 92.214,44.831 LED14.1@92.263,44.782 ; v1(100.838,86.208) 100.838,86.741 102.032,87.935 v1(109.017,87.935) 109.855,87.097 109.855,84.15 111.023,82.982 129.438,82.982 v1(132.232,80.188) ; v1(137.389,77.8) 159.233,77.8 v1(159.36,77.673) ; LED22.1@154.265,17.959 117.805,17.959 116.789,16.943 116.789,14.961 115.138,13.31 90.805,13.31 90.424,13.691 86.614,13.691 ; LED5.1@164.222,66.778 164.262,66.819 v1(164.262,68.326)
  Bottom Layer w0.254: v1(69.469,25.298) 69.469,29.997 72.441,32.969 76.352,32.969 77.445,34.061 77.394,34.112 v1(77.394,71.628) ; v1(90.399,30.378) 90.399,44.247 v1(90.983,44.831) ; v1(98.12,75.565) 100.838,78.283 v1(100.838,86.208) ; v1(109.017,87.935) 109.789,87.162 U4.12@109.789,85.32 ; v1(132.232,80.188) 134.62,77.8 v1(137.389,77.8) ; v1(159.36,77.673) 164.262,72.771 v1(164.262,68.326)
SEGF: LED6.1 LED9.10 LED15.1 LED23.1 U4.13 | length 286.6
  Top Layer w0.254: v1(73.787,31.115) 72.415,31.115 71.247,29.947 71.247,26.975 72.212,26.01 76.733,26.01 78.039,27.316 LED9.10@78.039,28.246 ; v1(78.981,78.118) 90.665,78.118 v1(90.703,78.156) ; v1(93.066,79.07) 93.116,79.121 v1@106.426,79.121 ; v1(106.451,79.146) v1@106.426,79.121 ; v1(131.089,75.768) 127.737,79.121 v1@106.426,79.121 ; LED15.1@131.354,44.782 132.793,44.782 v1(132.817,44.806) ; LED6.1@140.233,66.523 v1(140.233,68.275) ; v1(140.233,75.946) 172.466,75.946 175.539,72.873 175.539,58.064 v1(169.774,52.299) 167.538,50.063 167.538,34.417 164.135,31.013 v1(156.235,31.013) ; LED23.1@154.163,26.164 154.711,26.712 v1(154.711,27.178)
  Bottom Layer w0.254: v1(73.787,31.115) 74.6,31.928 77.622,31.928 78.295,32.601 78.295,73.47 77.851,73.914 77.851,76.987 v1(78.981,78.118) ; v1(90.703,78.156) 92.151,78.156 v1(93.066,79.07) ; v1(106.451,79.146) 108.534,81.229 108.534,85.305 U4.13@108.519,85.32 ; v1(131.089,75.768) 131.242,75.921 v1@140.233,75.921 ; v1(132.817,44.806) 141.148,44.806 142.24,45.898 142.24,50.495 144.043,52.299 v1(169.774,52.299) ; v1(140.233,68.275) v1@140.233,75.921 ; v1(140.233,75.946) v1@140.233,75.921 ; v1(154.711,27.178) 154.737,27.203 154.737,29.439 156.235,30.937 v1(156.235,31.013)
SEGG: LED7.1 LED9.5 LED16.1 U4.14 | length 237.5
  Top Layer w0.254: v1(89.738,15.748) 89.738,15.672 91.567,13.843 114.681,13.843 116.103,15.265 116.103,17.424 117.424,18.745 127.94,18.745 129.057,19.863 129.057,25.857 131.851,28.651 v1(152.832,28.651) ; v1(107.249,82.067) 107.961,81.356 110.465,81.356 111.354,80.467 v1(111.354,80.264) ; v1(111.354,78.08) 111.354,75.87 v1(113.297,73.927) ; v1(116.129,67.97) 116.241,67.858 LED7.1@116.241,66.778 ; v1(138.024,74.854) 171.907,74.854 174.396,72.365 174.396,58.395 166.421,50.419 166.421,45.466 ; v1@154.33,31.09 155.321,32.08 163.347,32.08 166.421,35.154 166.421,45.466 ; LED16.1@155.357,44.807 156.694,44.807 v1(156.718,44.831) ; v1(164.059,44.856) 165.811,44.856 166.421,45.466
  Bottom Layer w0.254: LED9.5@83.119,15.546 83.119,15.809 84.074,16.764 88.621,16.764 v1@89.687,15.697 ; v1(107.249,82.067) U4.14@107.249,85.32 ; v1(111.354,78.08) v1(111.354,80.264) ; v1(116.129,67.97) 116.129,71.095 v1(113.297,73.927) 137.096,73.927 v1(138.024,74.854) ; v1(152.832,28.651) 154.28,30.099 v1(154.28,31.14) ; v1(156.718,44.831) 164.033,44.831 v1(164.059,44.856)
SEGH: LED8.1 LED9.3 LED17.1 LED24.1 U4.15 | length 244
  Top Layer w0.35: LED8.1@92.238,66.778 92.253,66.793 v1(92.253,68.047) ; v1(107.213,97.892) 107.213,98.628 108.661,100.076 172.136,100.076 173.711,98.501 173.711,80.95 179.273,75.387 v1(179.273,52.095) ; LED17.1@178.359,44.755 179.299,44.755 ; v1(179.233,46.116) 179.233,44.82 179.299,44.755 ; LED24.1@180.035,44.755 179.299,44.755
  Bottom Layer w0.254: 78.003,17.348 78.003,19.939 79.527,21.463 91.237,21.463 92.558,22.784 92.558,29.743 97.46,34.646 98.527,34.646 100.978,37.097 100.978,40.221 103.099,42.342 103.099,45.593 101.873,46.818 101.873,77.425 101.752,77.546 ; v1(92.253,68.047) 101.752,77.546 ; U4.15@107.249,95.82 103.415,95.82 101.752,94.158 101.752,77.546
  Bottom Layer w0.35: U4.15@107.213,96.291 v1(107.213,97.892) ; v1(179.233,46.116) 179.233,52.055 v1(179.273,52.095)
STB: R11.1 U12.1 | length 55.1
  Top Layer w0.254: U12.1@107.199,39.346 107.199,40.371 108.331,41.504 v1(108.331,43.993)
  Bottom Layer w0.254: v1(108.331,43.993) 107.636,44.688 107.636,55.61 104.699,58.547 104.699,74.651 107.163,77.114 118.44,77.114 119.67,78.344 R11.1@119.67,79.656
ZERO: R2.2 U1.4 U12.33 | length 118.2
  Top Layer w0.35: v1(48.184,74.041) 48.197,74.028 66.488,74.028 66.501,74.041 v1(80.086,74.041) ; v1(80.467,56.413) v1(98.196,56.413) ; v1(99.797,52.502) 106.578,52.502 107.199,51.882 U12.33@107.199,51.346
  Bottom Layer w0.35: 29.175,92.837 32.106,92.837 33.02,91.923 33.02,79.807 38.786,74.041 v1(48.184,74.041) ; v1(80.086,74.041) 80.518,73.609 v1@80.518,56.413 ; v1(98.196,56.413) 99.797,54.813 v1(99.797,52.502)
  Bottom Layer w0.5: U1.4@29.175,95.174 29.175,92.837 29.175,91.614 R2.2@29.551,91.238
pads on no net: LED9.6 U3.3 U3.5 U4.1 U4.5 U4.6 U4.16 U4.17 U5.3 U5.5 U7.3 U7.4 U8.4 U9.7 U11.4

## Polygon pours and split planes (outlines as drawn)
GND on Bottom Layer "Bottom Layer-No Net" (solid, remove dead copper, pour order 22): -8.001,115.037 -8.001,-4.877 -7.645,-5.232 218.008,-5.232 219.862,-3.378 218.008,-1.524 218.008,115.57
GND on Top Layer "Bottom Layer-No Net" (solid, remove dead copper, pour order 24): -8.331,115.214 -8.331,-3.353 -7.137,-4.547 216.84,-4.547 218.516,-2.87 219.685,-1.702 219.685,114.529
no net on Internal Plane 2 (split plane): 225.88,117.119 225.88,-7.129 225.747,-7.262 -8.382,-7.262 -8.482,-7.272 -8.577,-7.301 -8.666,-7.348 -8.743,-7.411 -9.116,-7.785 -9.116,117.952

## Keep-outs
Keep-Out Layer:
  circle w0.1: c1.572,104.938 r1.75
  circle w0.1: c94.022,104.938 r1.75
  circle w0.1: c206.522,104.938 r1.75
  circle w0.1: c206.522,4.938 r1.75
  circle w0.1: c124.022,4.938 r1.75
  circle w0.1: c1.572,4.938 r1.75
  lines w0.1: -6.128,2.988 ccw(c-3.128,2.988) -3.128,-0.012 210.972,-0.012 ccw(c210.972,2.988) 213.972,2.988 213.972,107.088 ccw(c210.972,107.088) 210.972,110.088 -3.128,110.088 ccw(c-3.128,107.088) -6.128,107.088 -6.128,2.988
  lines w1.2: 20.676,24.968 25.832,32.131 ; 25.197,92.507 25.197,102.108 ; 27.381,66.065 27.407,35.611

## Other copper
Top Layer:
  rectangle net GND: 101.143,33.02 102.54,35.509
  rectangle net SEGH: 77.191,14.427 78.994,17.475
  rectangle net 5V: 82.448,10.211 84.252,11.074
  rectangle net GND: 50.978,9.195 56.261,14.529
  rectangle net 5V: 97.663,33.172 100.254,33.985
  rectangle net GND: 91.44,15.164 96.799,17.678
  rectangle net GND: 72.339,5.715 75.057,11.608
  rectangle net NetBUZZ1_2: 198.247,80.797 202.057,84.252
  rectangle net N: 0.737,81.534 4.877,100.66
  rectangle net L: 9.195,80.315 13.106,100.686
  rectangle net NetC26_2: 8.865,42.012 12.649,48.133
  rectangle net NetC27_2: 9.119,23.368 12.903,29.337
  rectangle net SEGE: 71.907,13.691 73.812,17.577
  rectangle net SEGD: 74.447,14.199 76.454,17.628
  rectangle net SEGC: 79.527,14.275 81.636,17.704
  rectangle net SEGG: 82.144,14.275 84.303,17.526
  rectangle net GRID1: 72.06,27.051 73.939,29.667
  rectangle net SEGA: 74.6,27.051 76.479,29.667
  rectangle net SEGF: 77.14,27.051 79.019,29.667
  rectangle net GRID2: 79.68,27.051 81.559,29.667
  rectangle net GRID3: 82.158,27.075 84.038,29.691
  rectangle net SEGB: 84.76,27.051 86.639,29.667
  rectangle net GND: 85.344,5.613 89.078,12.878
  rectangle net GND: 36.22,31.344 39.726,33.477
  rectangle net GND: 36.17,31.623 39.065,36.779
  rectangle net GND: 95.275,5.74 98.4,12.649
  rectangle net GND: 91.211,5.69 119.482,8.23
  rectangle net GND: 178.613,87.198 180.569,87.935
  rectangle net GND: 158.674,86.919 160.426,89.687
  pour cut-out: 202.921,98.362 202.921,41.237 218.288,41.237 218.186,41.339 218.186,98.362
  region net N: 0.737,81.534 0.737,76.454 4.013,73.177 4.013,70.764 1.346,68.097 1.346,23.876 1.956,23.266 4.191,23.266 4.674,23.749 4.674,67.945 5.766,69.037 5.766,80.645 4.877,81.534
  region net L: 9.195,80.315 9.195,68.453 11.481,66.167 13.157,66.167 14.148,67.158 14.148,68.402 11.659,70.891 11.659,78.867 13.106,80.315
  pour cut-out: 0.102,109.83 29.058,109.83 29.058,-0.025 29.032,0 0,0
Bottom Layer:
  rectangle net GND: 101.473,32.995 102.413,34.671
  rectangle net 5V: 97.688,33.071 100.508,34.036
  rectangle net SEGH: 77.191,14.427 79.019,17.831
  rectangle net NetBUZZ1_2: 198.679,80.924 201.752,84.049
  rectangle net NetC27_2: 9.093,22.631 13.132,29.566
  rectangle net NetC26_2: 8.89,42.85 12.319,48.26
  rectangle net N: 3.48,70.587 5.791,77.292
  rectangle net L: 9.119,71.399 11.481,75.108
  rectangle net L: 11.303,64.516 14.046,69.24
  rectangle net SEGB: 84.785,26.873 86.614,29.693
  rectangle net GRID3: 82.245,26.873 84.074,29.693
  rectangle net GRID2: 79.705,26.873 81.534,29.693
  rectangle net SEGF: 77.205,26.643 79.034,29.462
  rectangle net SEGA: 74.589,26.643 76.418,29.462
  rectangle net GRID1: 72.085,26.873 73.914,29.693
  rectangle net SEGE: 71.973,14.578 73.802,17.397
  rectangle net SEGD: 74.513,14.603 76.342,17.423
  rectangle net SEGC: 79.568,14.324 81.396,17.143
  rectangle net SEGG: 82.245,14.173 84.074,16.993
  rectangle net SEGC: 79.502,14.148 81.686,17.704
  rectangle net SEGD: 74.473,14.503 76.505,17.653
  rectangle net SEGE: 71.831,14.605 73.99,17.628
  rectangle net GND: 115.545,1.905 119.736,8.255
  rectangle net GND: 36.17,35.763 38.989,36.779
  rectangle net GND: 36.246,31.293 39.7,33.503
  rectangle net GND: 178.562,87.147 180.569,87.909
  rectangle net GND: 158.547,86.893 160.503,89.002
  region net GND: 101.473,34.671 101.473,35.306 101.702,35.535 102.438,35.535 102.54,35.433 102.54,33.122 102.413,32.995
  pour cut-out: 110.541,8.382 110.846,8.077 110.846,6.375 111.15,6.375 111.481,6.706 111.1,7.087 111.1,9.119
  region net +12V: 138.328,19.406 138.328,12.852 136.271,10.795 136.347,10.719 143.078,10.719 143.18,10.82 143.18,16.307 139.268,20.218 138.684,20.218
  region net 5V: 66.04,15.697 66.37,15.367 67.208,15.367 70.663,11.913 74.828,11.913 75.286,11.455 75.286,10.236 75.921,9.601 81.28,9.601 81.559,9.881 81.559,11.201 81.356,11.405 78.715,11.405 78.232,11.887 78.232,13.157 77.241,14.148 71.73,14.148 70.002,15.875 70.002,20.676 69.444,21.234 66.446,21.234 66.04,20.828
  region net GND: 65.999,11.326 72.974,11.481 73.457,10.998 73.457,9.347 73.076,8.966 69.977,8.966 68.428,10.719 66.523,10.719 65.913,10.693
  region net NetC5_1: 66.065,12.014 66.421,11.659 67.793,11.659 67.793,13.995 67.183,14.605 66.065,14.605
  region net NetC5_2: 64.135,11.684 64.135,12.344 63.652,12.827 62.865,12.827 62.205,13.487 62.205,15.672 61.265,16.612 61.265,20.447 62.027,21.209 65.303,21.209 65.481,21.031 65.481,14.783 65.405,14.707 65.405,14.503 65.405,12.344
  pour cut-out: 202.743,98.489 202.743,41.364 218.11,41.364 218.008,41.466 218.008,98.489
  region net N: 0.813,77.826 3.404,75.235 3.404,70.053 1.321,67.97 1.321,24.003 1.803,23.52 4.115,23.52 4.597,24.003 4.597,67.818 5.791,69.012 5.791,80.569 4.902,81.458 4.902,100.584 4.318,101.168 1.346,101.168 0.813,100.635
  region net L: 9.271,81.585 9.83,81.026 12.598,81.026 13.132,81.559 13.132,100.152 12.548,100.736 9.855,100.736 9.271,100.152
  pour cut-out: 0.102,109.83 29.058,109.83 29.058,-0.025 29.032,0 0,0
  pour cut-out: 37.059,94.59 37.059,80.67 37.084,80.645 51.511,80.645 51.511,94.513 51.46,94.564
  pour cut-out: 61.011,94.869 61.011,80.95 61.036,80.924 75.463,80.924 75.463,94.793 75.413,94.844
  pour cut-out: 85.065,94.742 85.065,80.823 85.09,80.797 99.517,80.797 99.517,94.666 99.466,94.717
  pour cut-out: 133.147,94.767 133.147,80.848 133.172,80.823 147.599,80.823 147.599,94.691 147.549,94.742
  pour cut-out: 37.16,72.822 37.16,58.903 37.186,58.877 51.613,58.877 51.613,72.746 51.562,72.796
  pour cut-out: 61.011,72.796 61.011,58.877 61.036,58.852 75.463,58.852 75.463,72.72 75.413,72.771
  pour cut-out: 85.09,72.72 85.09,58.801 85.115,58.776 99.543,58.776 99.543,72.644 99.492,72.695
  pour cut-out: 109.169,72.949 109.169,59.03 109.195,59.004 123.622,59.004 123.622,72.873 123.571,72.923
  pour cut-out: 133.071,72.923 133.071,59.004 133.096,58.979 147.523,58.979 147.523,72.847 147.472,72.898
  pour cut-out: 157.124,72.898 157.124,58.979 157.15,58.953 171.577,58.953 171.577,72.822 171.526,72.873
  pour cut-out: 37.059,50.902 37.059,36.982 37.084,36.957 51.511,36.957 51.511,50.825 51.46,50.876
  pour cut-out: 61.062,50.876 61.062,36.957 61.087,36.932 75.514,36.932 75.514,50.8 75.463,50.851
  pour cut-out: 85.039,50.902 85.039,36.982 85.065,36.957 99.492,36.957 99.492,50.825 99.441,50.876
  pour cut-out: 124.155,50.749 124.155,36.83 124.181,36.805 138.608,36.805 138.608,50.673 138.557,50.724
  pour cut-out: 148.184,50.876 148.184,36.957 148.209,36.932 162.636,36.932 162.636,50.8 162.585,50.851
  pour cut-out: 172.161,50.851 172.161,36.932 172.187,36.906 186.614,36.906 186.614,50.775 186.563,50.825
  pour cut-out: 172.06,28.829 172.06,14.91 172.085,14.884 186.512,14.884 186.512,28.753 186.461,28.804
  pour cut-out: 98.958,28.956 98.958,15.037 98.984,15.011 113.411,15.011 113.411,28.88 113.36,28.931
  pour cut-out: 44.958,29.108 44.958,15.189 44.983,15.164 59.411,15.164 59.411,29.032 59.36,29.083
  pour cut-out: 19.914,22.758 19.914,8.839 19.939,8.814 34.366,8.814 34.366,22.682 34.315,22.733
  region net +12V: 36.576,17.805 36.576,8.763 36.855,8.484 39.522,8.484 39.522,12.827 40.513,13.818 40.615,13.716 43.409,13.716 44.272,14.58 40.361,18.491 39.268,18.491

## Silkscreen, mask and mechanical layers (free items; w line width, h text height)
Top Overlay:
  rectangle: 100.559,9.652 105.08,12.522
  text "+" at 110.871,11.659 h2 r180
Bottom Overlay:
  rectangle: 100.533,9.627 105.054,12.497
  text "AB-SENSOR" at 171.831,106.299 h3 r180
  text "FUN-SENSOR" at 152.375,106.121 h3 r180
  text "+" at 42.937,16.943 h2 r180
  text "-" at 99.339,12.594 h2 r180
  text "+" at 110.973,10.617 h2 r180
  text "-" at 43.089,10.568 h2 r180
  text "S10B-M-V1.0_HF" at 90.983,8.839 h3 r180
  text "20241029 BT" at 91.237,5.944 h3 r180
Mechanical 2:
  drawing of 690 lines, arcs and shapes, not listed
  text "110 (mm)" at -7.315,49.838 h1.52 r90
  text "220 (mm)" at 104.388,-4.914 h1.52

## Text inside footprints (layer, text, board x,y; h text height)
J8: Bottom Overlay "*" at 157.694,16.715 h1.33 r180
U2: Bottom Overlay "~" at 22.452,85.151 h0.84 r90; Bottom Overlay "~" at 20.312,85.092 h0.84 r90; Bottom Overlay "-" at 22.192,87.988 h0.84 r90; Bottom Overlay "+" at 20.007,88.064 h0.84 r90